# Altium PCB 4Z_PCB_2.PcbDoc (part 2 of 2)
Units mm, origin at the board's own origin, x right, y up, seen from the top; angles counter-clockwise.
Board outline 89.86 x 89.86 mm, 2 copper layers (Top Layer, Bottom Layer); 100 components, 102 nets, 472 pads, 154 vias.
Unrouted connection lines stored in the file: 1.
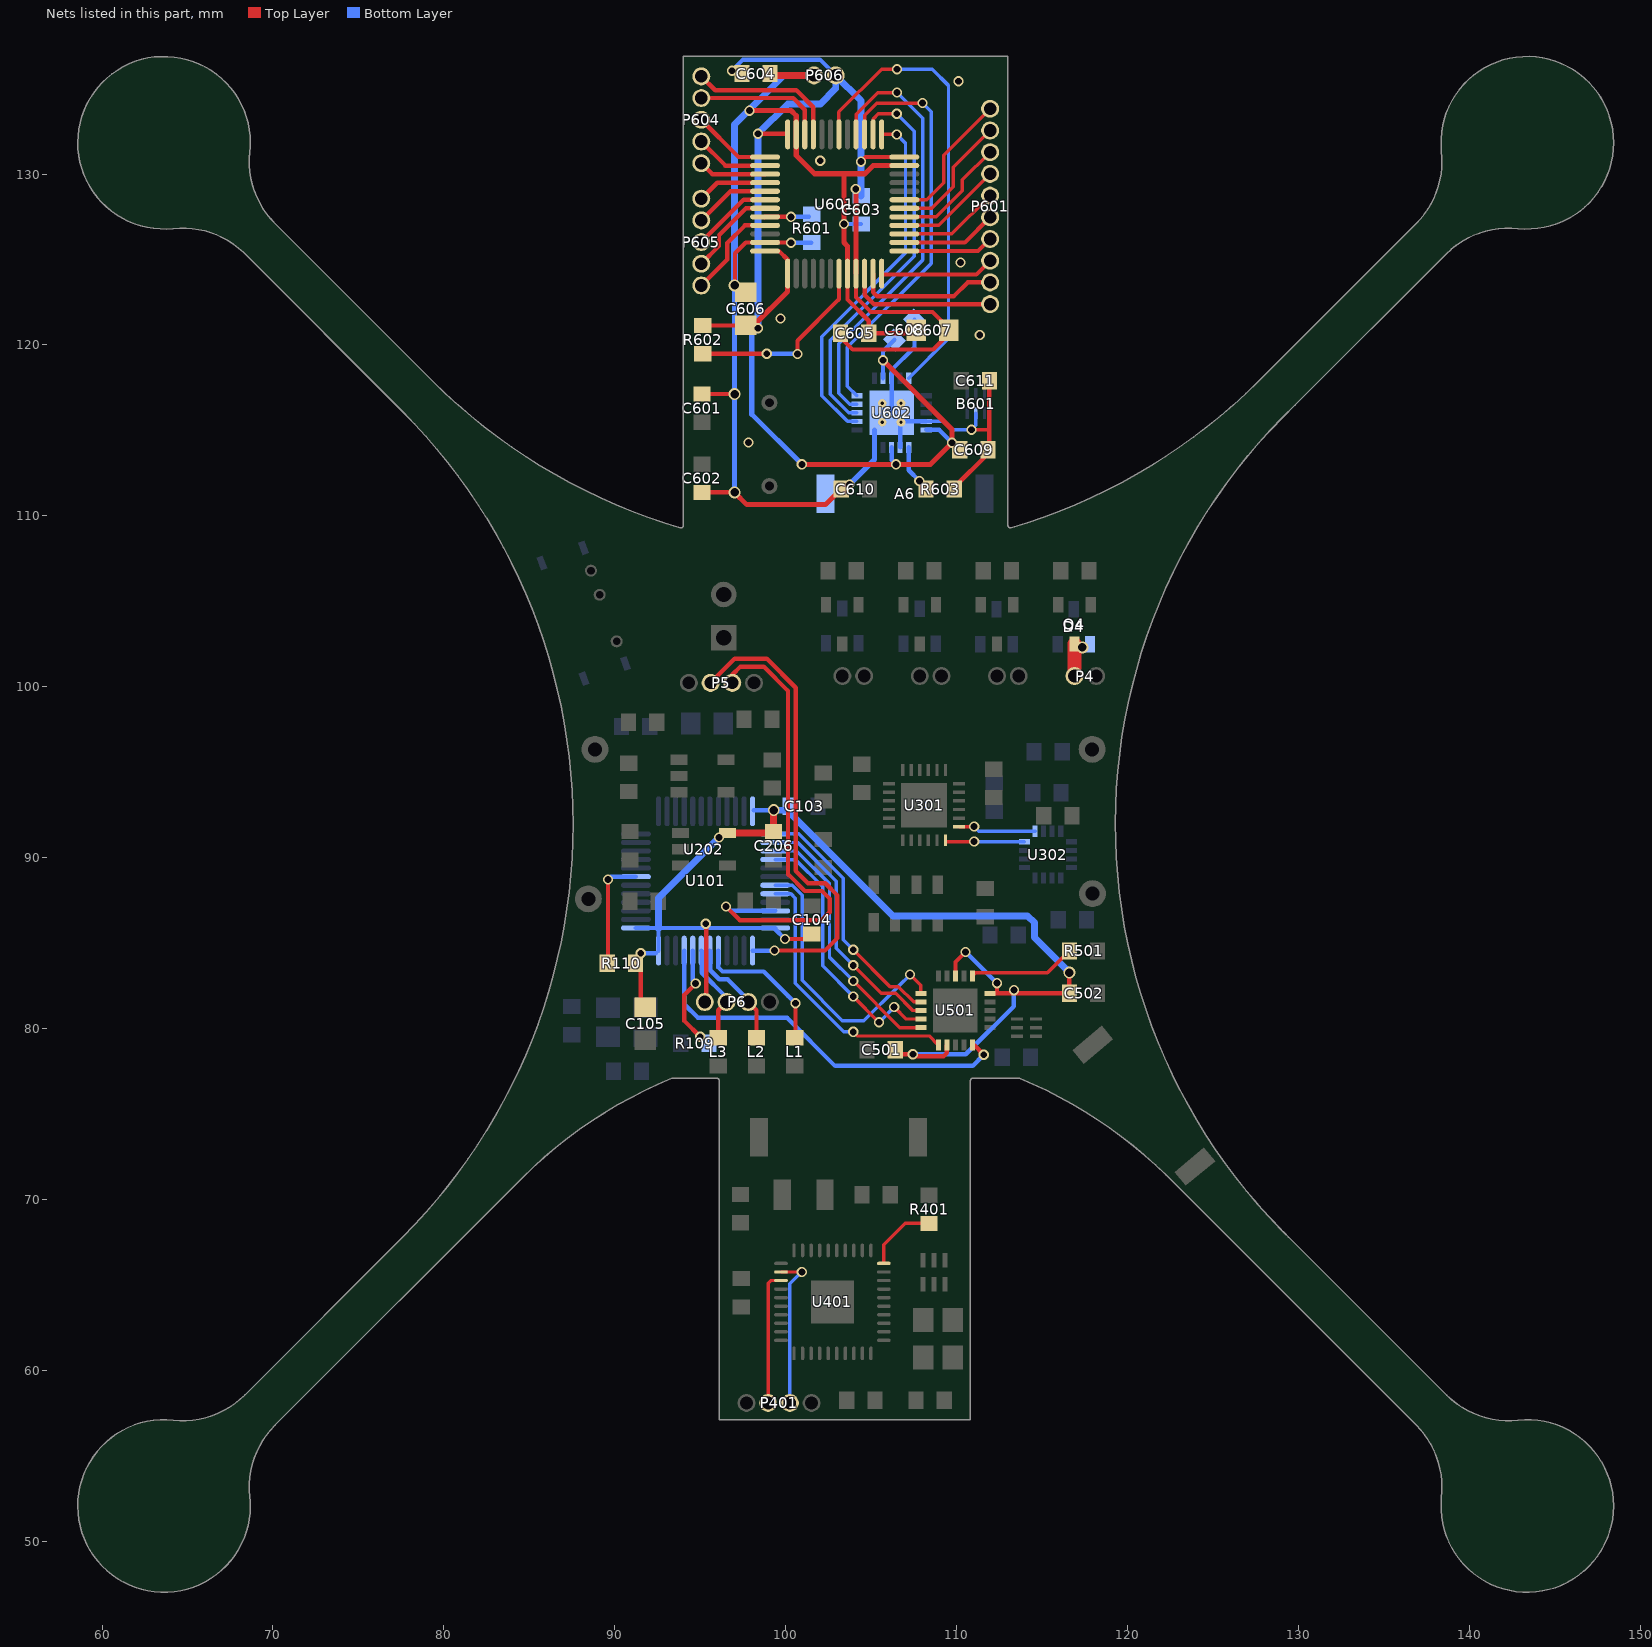
[diagram p2: the nets of this part, all layers, seen from the top]

## Via types
v1: diameter 0.6, hole 0.4, Top Layer to Bottom Layer, 116 vias
v2: diameter 0.7, hole 0.5, Top Layer to Bottom Layer, 18 vias
v3: diameter 0.5, hole 0.2, Top Layer to Bottom Layer, 16 vias
v4: diameter 8, hole 7, Top Layer to Bottom Layer, 4 vias

## Nets (pads, with @x,y where several pads share a name; then routed paths per layer and width w, separated by ;. In a path a pad name is that pad's centre, name@x,y a point inside that pad or via, vN(x,y) a via of type N, cw(c..) or ccw(c..) an arc to the next point about the centre after c; other vN are vias at no path point) (continued)
NetD4_1: D4.1 P4.1 Q4.3 | length 13.1
  Top Layer w0.8: P4.1@116.895,100.63 Q4.3@116.896,102.3 ; P4.1@116.895,100.63 Q4.3@116.896,102.501 ; P4.1@116.895,100.63 Q4.3@116.896,102.501 ; P4.1@116.895,100.63 Q4.3@116.896,102.3 ; P4.1@116.895,100.63 Q4.3@116.896,102.501 ; P4.1@116.895,100.63 Q4.3@116.896,102.3 ; P4.1@116.895,100.63 Q4.3@116.896,102.501 ; Q4.3@116.896,102.3 Q4.3@116.896,102.501 ; Q4.3@116.896,102.3 Q4.3@116.896,102.501 ; Q4.3@116.896,102.3 Q4.3@116.896,102.501
  other v2: 117.36,102.3
NetL1_2: L1.2 U101.41 | length 8.3
  Top Layer w0.254: L1.2@100.57,79.501 v1(100.57,81.48)
  Bottom Layer w0.254: U101.41@96.06,84.565 96.06,83.58 96.3,83.34 98.72,83.34 100.15,81.91 100.15,81.9 v1(100.57,81.48)
NetL2_2: L2.2 P6.3 U101.42 | length 6.5
  Top Layer w0.254: P6.3@97.805,81.56 98.289,81.076 L2.2@98.289,79.46
  Bottom Layer w0.254: U101.42@95.56,84.565 95.583,84.542 95.583,83.415 96.112,82.886 96.599,82.886 97.805,81.68 P6.3@97.805,81.56
NetL3_2: L3.2 P6.2 U101.43 | length 5.9
  Top Layer w0.254: L3.2@96.049,79.46 96.049,81.074 P6.2@96.535,81.56
  Bottom Layer w0.254: U101.43@95.06,84.565 95.083,84.542 95.083,83.273 96.535,81.821 P6.2@96.535,81.56
NetP401_2: P401.2 U401.2 | length 9.2
  Top Layer w0.2: U401.2@99.725,65.76 v1@100.94,65.76
  Bottom Layer w0.2: P401.2@100.242,58.098 100.242,65.063 v1(100.945,65.765)
NetP401_3: P401.3 U401.3 | length 7.8
  Top Layer w0.2: P401.3@98.972,58.098 98.972,65.098 99.135,65.26 U401.3@99.725,65.26
NetP601_1: P601.1 U601.10 | length 8.8
  Top Layer w0.254: U601.10@104.615,124.17 104.615,122.943 105.172,122.386 111.956,122.386 P601.1@111.96,122.39
NetP601_2: P601.2 U601.11 | length 8.4
  Top Layer w0.254: U601.11@105.115,124.17 105.115,123.085 105.36,122.84 109.825,122.84 110.645,123.66 P601.2@111.96,123.66
NetP601_3: P601.3 U601.12 | length 6.7
  Top Layer w0.254: U601.12@105.615,124.17 105.66,124.125 111.155,124.125 P601.3@111.96,124.93
NetP601_4: P601.4 U601.13 | length 5.3
  Top Layer w0.254: U601.13@106.94,125.495 111.255,125.495 P601.4@111.96,126.2
NetP601_5: P601.5 U601.14 | length 5.6
  Top Layer w0.254: U601.14@106.94,125.995 110.485,125.995 P601.5@111.96,127.47
NetP601_6: P601.6 U601.15 | length 5.9
  Top Layer w0.2: U601.15@106.94,126.495 109.715,126.495 P601.6@111.96,128.74
NetP601_7: P601.7 U601.16 | length 6.3
  Top Layer w0.2: U601.16@106.94,126.995 108.945,126.995 P601.7@111.96,130.01
NetP601_8: P601.8 U601.17 | length 7
  Top Layer w0.2: U601.17@106.94,127.495 108.82,127.495 110.34,129.015 110.34,129.66 P601.8@111.96,131.28
NetP601_9: P601.9 U601.18 | length 7.6
  Top Layer w0.2: U601.18@106.94,127.995 108.545,127.995 109.805,129.255 109.805,130.395 P601.9@111.96,132.55
NetP601_10: P601.10 U601.19 | length 8.2
  Top Layer w0.2: U601.19@106.94,128.495 108.25,128.495 109.24,129.485 109.24,131.1 P601.10@111.96,133.82
NetP604_1: P604.1 U601.33 | length 8.9
  Top Layer w0.254: P604.1@95.06,135.715 95.876,134.899 100.623,134.899 101.615,133.907 U601.33@101.615,132.32
NetP604_2: P604.2 U601.34 | length 7.8
  Top Layer w0.254: P604.2@95.06,134.445 100.435,134.445 101.115,133.765 U601.34@101.115,132.32
NetP604_3: P604.3 U601.37 | length 4.6
  Top Layer w0.254: P604.3@95.06,133.175 97.24,130.995 U601.37@98.79,130.995
NetP604_4: P604.4 U601.38 | length 4.3
  Top Layer w0.254: P604.4@95.06,131.905 96.47,130.495 U601.38@98.79,130.495
NetP604_5: P604.5 U601.39 | length 4
  Top Layer w0.254: P604.5@95.06,130.635 95.7,129.995 U601.39@98.79,129.995
NetP605_1: P605.1 U601.40 | length 4.1
  Top Layer w0.254: P605.1@95.06,128.56 95.995,129.495 U601.40@98.79,129.495
NetP605_2: P605.2 U601.41 | length 4.4
  Top Layer w0.254: P605.2@95.06,127.29 96.765,128.995 U601.41@98.79,128.995
NetP605_3: P605.3 U601.42 | length 4.8
  Top Layer w0.254: P605.3@95.06,126.02 97.535,128.495 U601.42@98.79,128.495
NetP605_4: P605.4 U601.43 | length 5.4
  Top Layer w0.254: P605.4@95.06,124.75 96.1,125.79 96.1,126.418 97.677,127.995 U601.43@98.79,127.995
NetP605_5: P605.5 U601.45 | length 5.8
  Top Layer w0.254: P605.5@95.06,123.48 96.58,125 96.58,125.965 97.61,126.995 U601.45@98.79,126.995
NetR109_1: R109.1 U101.44 | length 5.8
  Top Layer w0.254: v1(94.73,82.64) 94.07,81.98 94.07,80.45 v1(95,79.52)
  Bottom Layer w0.254: U101.44@94.56,84.565 94.56,82.81 v1(94.73,82.64)
NetR110_1: R110.1 U101.7 | length 6.6
  Top Layer w0.254: R110.1@89.6,83.862 v1(89.6,88.73)
  Bottom Layer w0.254: v1(89.6,88.73) 89.76,88.89 U101.7@91.235,88.89
NetR401_2: R401.2 U401.30 | length 4.2
  Top Layer w0.2: U401.30@105.745,66.26 105.745,66.905 105.745,67.35 106.995,68.6 107.44,68.6 R401.2@108.386,68.6
NetR501_1: R501.1 U501.16 | length 6.3
  Top Layer w0.2: U501.16@110.93,83.085 111.095,83.25 111.095,83.26 115.318,83.26 R501.1@116.599,84.541
NetR601_2: R601.2 U601.44 | length 2.6
  Top Layer w0.254: U601.44@98.767,127.472 U601.44@98.79,127.495 v1(100.315,127.495)
  Bottom Layer w0.254: v1(100.315,127.495) R601.2@101.366,127.495
NetR602_1: R602.1 U601.7 | length 11.2
  Top Layer w0.254: R602.1@95.178,119.455 95.213,119.49 v1(98.89,119.49) ; v1(100.69,119.475) 100.69,120.251 103.092,122.653 103.115,122.676 U601.7@103.115,124.17
  Bottom Layer w0.254: v1(98.89,119.49) 100.635,119.49 100.67,119.455 v1(100.69,119.475)
NetR603_1: R603.1 U602.16 | length 2.2
  Bottom Layer w0.254: U602.16@107.195,114.005 107.195,112.665 v1(107.82,112.04)
NetU101_25: U101.25 U501.2 | length 14.7
  Top Layer w0.2: v1(103.95,84.61) 106.1,82.46 106.596,82.46 107.496,81.56 U501.2@107.905,81.56
  Bottom Layer w0.2: U101.25@99.385,91.39 100.77,91.39 103.36,88.8 103.36,85.2 v1(103.95,84.61)
NetU101_26: U101.26 U501.3 | length 14.9
  Top Layer w0.2: v1(103.95,83.7) 105.59,82.06 106.43,82.06 107.43,81.06 U501.3@107.905,81.06
  Bottom Layer w0.2: U101.26@99.385,90.89 100.704,90.89 102.96,88.634 102.96,84.69 v1(103.95,83.7)
NetU101_27: U101.27 U501.5 | length 15.3
  Top Layer w0.2: v1(103.95,82.79) 106.68,80.06 U501.5@107.905,80.06
  Bottom Layer w0.2: U101.27@99.385,90.39 100.638,90.39 102.56,88.468 102.56,84.18 v1(103.95,82.79)
NetU101_28: U101.28 U501.4 | length 15.8
  Top Layer w0.2: v1(103.95,81.88) 105.455,80.375 v1(105.46,80.375) ; v1(106.345,81.265) 107.05,80.56 U501.4@107.905,80.56
  Bottom Layer w0.2: U101.28@99.385,89.89 100.573,89.89 102.16,88.303 102.16,83.67 v1(103.95,81.88) ; v1(105.46,80.375) 105.46,80.38 v1(106.345,81.265)
NetU101_31: U101.31 U501.1 | length 16.8
  Top Layer w0.2: v1@107.305,83.095 107.275,83.125 v1(107.275,83.164) 107.905,82.534 U501.1@107.905,82.06
  Bottom Layer w0.2: U101.31@99.385,88.39 100.376,88.39 100.96,87.806 100.96,82.819 103.319,80.46 104.571,80.46 106.605,82.494 v1(107.275,83.164) v1@107.344,83.095
NetU101_32: U101.32 U501.6 | length 16.1
  Top Layer w0.2: v1(103.95,79.81) 104.19,79.57 108.395,79.57 U501.6@108.93,79.035
  Bottom Layer w0.2: U101.32@99.385,87.89 100.31,87.89 100.56,87.64 100.56,82.653 103.403,79.81 v1(103.95,79.81)
NetU301_6: U301.6 U302.16 | length 4.5
  Top Layer w0.2: U301.6@109.425,90.945 v1(111.025,90.945)
  Bottom Layer w0.2: v1@111.04,90.93 U302.16@113.97,90.93
NetU301_7: U301.7 U302.1 | length 4.6
  Top Layer w0.2: U301.7@110.15,91.82 v1(111.025,91.82)
  Bottom Layer w0.2: v1(111.025,91.82) 111.295,91.55 U302.1@114.59,91.55
NetU601_25: U601.25 U602.2 | length 21.1
  Top Layer w0.2: U601.25@105.615,132.32 v1(106.495,132.32)
  Bottom Layer w0.2: U602.2@104.17,115.53 103.614,115.53 102.105,117.039 102.105,120.481 107.01,125.386 107.01,131.805 v1(106.495,132.32)
NetU601_26: U601.26 U602.3 | length 23.3
  Top Layer w0.2: U601.26@105.115,132.32 105.115,133.22 105.42,133.525 v1(106.495,133.525)
  Bottom Layer w0.2: U602.3@104.17,116.03 103.679,116.03 102.605,117.104 102.605,120.274 107.51,125.179 107.51,132.51 v1(106.495,133.525)
NetU601_27: U601.27 U602.5 | length 24.4
  Top Layer w0.2: U601.27@104.615,132.32 104.615,133.435 105.33,134.15 v1(108.01,134.15)
  Bottom Layer w0.2: U602.5@104.17,117.03 103.605,117.595 103.605,119.86 108.51,124.765 108.51,133.65 v1(108.01,134.15)
NetU601_28: U601.28 U602.4 | length 25.7
  Top Layer w0.2: U601.28@104.115,132.32 104.115,133.501 105.379,134.765 v1(106.515,134.765)
  Bottom Layer w0.2: U602.4@104.17,116.53 103.745,116.53 103.105,117.17 103.105,120.067 108.01,124.972 108.01,133.27 v1(106.515,134.765)
NetU601_30: U601.30 U602.10 | length 27.2
  Top Layer w0.2: U601.30@103.115,132.32 103.115,133.632 105.613,136.13 v1(106.515,136.13)
  Bottom Layer w0.2: v1(106.515,136.13) 108.575,136.13 109.525,135.18 109.525,120.385 U602.10@107.195,118.055
PIN24: C103.2 C104.2 C105.1 C206.2 C501.2 C502.1 P6.1 R110.2 U101.1 U101.24 U101.36 U101.48 U202.5 U501.7 U501.15 U501.18 | length 90
  Top Layer w0.254: R110.2@91.21,83.75 R110.2@91.21,83.821 ; v1(95.32,86.14) 95.357,86.103 P6.1@95.357,81.652 ; v1(99.96,85.24) C104.2@101.231,85.24 ; C501.2@106.671,78.5 v1(107.44,78.5) 107.557,78.383 109.233,78.383 109.43,78.58 U501.7@109.43,79.035 ; U501.18@109.953,83.085 U501.18@109.93,83.085 109.93,83.9 v1(110.515,84.485) ; 112.36,82.09 v1(112.36,82.66) ; C502.1@116.599,82.061 v2@116.599,83.269 ; C105.1@91.52,81.495 v1(91.52,84.41) C105.1@91.52,81.495 ; U501.15@111.955,82.06 C502.1@116.599,82.061 U501.15@111.955,82.06
  Top Layer w0.4: U202.5@96.588,91.44 C206.2@99.203,91.44 ; C206.2@99.287,91.524 v2@99.287,92.767
  Bottom Layer w0.254: U101.1@91.235,85.89 92.56,85.89 ; v1(91.52,84.41) 92.405,84.41 ; U101.48@92.56,84.565 92.56,85.85 ; U101.24@98.125,92.78 v2(99.3,92.78) ; v1(99.96,85.24) 99.385,85.815 U101.36@99.385,85.89 ; v1(107.44,78.5) 110.54,78.5 113.35,81.31 v1(113.35,82.25) ; v1(110.515,84.485) 110.535,84.485 v1(112.36,82.66) ; 92.56,85.89 U101.36@99.385,85.89 ; 92.56,85.89 U101.36@99.385,85.89
  Bottom Layer w0.4: 92.56,85.85 92.56,85.89 92.56,87.64 v1(96.1,91.18) ; v2(99.3,92.78) 100.087,92.78 106.272,86.595 114.155,86.595 114.548,86.202 114.548,85.322 v2(116.6,83.27)
SAGND: A6.2 B601.2 C601.1 C602.1 C603.1 C604.1 C605.1 C606.2 C607.2 C608.1 C609.1 C610.1 C611.1 P606.2 R601.1 R603.2 U601.8 U601.23 U601.35 U601.47 U602.8 U602.14 U602.17 U602.20 U602.21 | length 97.9
  Top Layer w0.2: v1@110.865,114.945 v1(110.865,115.035) 111.911,115.035 ; C609.1@111.831,113.864 C609.1@111.831,114.069
  Top Layer w0.254: C602.1@95.099,111.374 v2(97.005,111.374) ; C601.1@95.099,117.126 v2(97.005,117.126) ; v2(97.005,123.49) 97.034,123.49 97.034,125.369 97.66,125.995 U601.47@98.79,125.995 v1@100.29,125.995 ; U601.8@103.615,124.17 103.615,122.659 104.861,121.413 C605.1@104.861,120.679 C607.2@107.441,120.679 ; R603.2@109.865,111.67 111.831,113.636 C609.1@111.831,113.864 ; C609.1@111.916,113.949 C611.1@111.916,117.899
  Top Layer w0.3: v2(97.005,111.374) 97.724,110.655 102.333,110.655 C610.1@103.249,111.571 ; v1(97.875,133.71) 100.315,133.71 100.615,133.41 U601.35@100.615,132.32 100.615,131.08 101.68,130.015 104.64,130.015 105.12,130.495 U601.23@106.94,130.495 ; 103.405,129.975 v1(103.405,127.08) 103.405,125.99 103.615,125.78 U601.8@103.615,124.17
  Top Layer w0.4: C604.1@99.195,135.77 P606.2@101.655,135.77
  Bottom Layer w0.2: U602.14@108.22,115.53 109.3,115.53 109.795,115.035 v1(110.865,115.035) 111.13,115.3 B601.2@111.13,116.02
  Bottom Layer w0.254: v1(100.305,125.98) R601.1@101.502,125.98 ; v1(103.405,127.08) C603.1@104.405,127.08 ; U602.21@106.195,116.03 U602.8@106.195,118.055 106.195,118.53 107.532,119.867 C608.1@107.532,121.466 ; U602.17@106.695,114.005 106.695,115.53 U602.14@108.22,115.53
  Bottom Layer w0.3: v2(97.005,111.374) v2(97.005,117.126) v2(97.005,123.49) ; v1(103.73,111.83) 105.195,113.295 U602.20@105.195,114.005 U602.21@105.195,115.03
  Bottom Layer w0.4: v2(97.005,123.49) 97.005,132.89 99.885,135.77 P606.2@101.655,135.77
  other v1: 97.825,114.29 111.355,120.58 99.7,121.55 110.22,124.825 102.025,130.78 110.115,135.425
  other v3: 105.645,115.48 106.745,115.48 105.645,116.58 106.745,116.58
SPIN9: C603.2 C604.2 C605.2 C606.1 C607.1 C608.2 C609.2 P606.1 R602.2 U601.1 U601.9 U601.24 U601.36 U601.48 U602.7 U602.15 U602.18 | length 99
  Top Layer w0.254: R602.2@95.144,121.14 97.63,121.14 C606.1@97.655,121.165 C606.1@98.145,121.165 ; v1(98.38,132.36) U601.36@100.075,132.36 ; U601.48@98.79,125.495 99.6,125.495 100.115,124.98 U601.1@100.115,124.17 ; C605.2@103.21,120.679 103.21,120.44 103.913,119.737 108.628,119.737 109.535,120.645 C607.1@109.535,120.864 ; U601.9@104.115,124.17 104.115,122.801 104.138,122.778 104.984,121.932 108.588,121.932 C607.1@109.535,120.985 ; v1(104.405,130.725) 104.675,130.995 U601.24@106.94,130.995
  Top Layer w0.3: U601.1@100.115,124.17 100.115,123.135 ; v1(100.945,113.015) v1(106.45,113.015) 108.47,113.015 v1(109.735,114.28) 109.735,115.06 v1(105.69,119.105) ; U601.9@104.115,124.17 v1@104.115,129.105 ; C606.1@98.17,121.19 98.145,121.165 C606.1@98.17,121.19 ; C606.1@98.17,121.19 100.115,123.135 ; C606.1@98.17,121.19 100.115,123.135
  Bottom Layer w0.254: v1(96.855,136.045) 97.505,136.695 102,136.695 P606.1@102.925,135.77 ; U602.7@105.695,118.055 105.695,119.629 C608.2@106.364,120.298 ; U602.18@106.195,114.005 106.195,113.27 v1(106.45,113.015) ; U602.15@108.22,115.03 108.985,115.03 v1(109.735,114.28)
  Bottom Layer w0.3: v1(98.38,120.98) 98.015,120.615 98.015,115.945 v1(100.945,113.015)
  Bottom Layer w0.4: v1(98.38,120.98) v1(98.38,132.36) 100.12,134.1 102.03,134.1 102.925,134.995 P606.1@102.925,135.77 104.405,134.29 v1(104.405,130.725) ; C603.2@104.411,128.725 v1@104.411,130.719
  other v1: 104.095,129.125
SWCLK: P5.3 U101.37 | length 27.8
  Top Layer w0.254: P5.3@95.605,100.23 97.009,101.634 98.898,101.634 100.584,99.948 100.584,89.228 101.308,88.504 102.313,88.504 103.024,87.793 103.024,85.299 102.295,84.57 v1(99.34,84.57)
  Bottom Layer w0.254: U101.37@98.06,84.565 v1@99.335,84.565
SWDIO: P5.2 U101.34 | length 28.6
  Top Layer w0.254: v1(96.51,87.15) 97.32,86.34 102.095,86.34 102.57,86.815 102.57,87.605 102.125,88.05 101.12,88.05 100.13,89.04 100.13,99.76 98.71,101.18 97.35,101.18 96.875,100.705 P5.2@96.875,100.23
  Bottom Layer w0.254: v1(96.51,87.15) 96.77,86.89 U101.34@99.385,86.89
W_CLK: U101.45 U501.10 | length 23.3
  Top Layer w0.254: U501.10@110.93,79.035 111.025,79.035 v1(111.59,78.47)
  Bottom Layer w0.254: U101.45@94.06,84.565 94.06,81.43 94.86,80.63 100.08,80.63 102.89,77.82 110.94,77.82 v1(111.59,78.47)
pads on no net: B501.2 B501.6 B601.6 D1.2 D2.2 D3.2 D4.2 K201.0 K201.3 U101.2 U101.3 U101.4 U101.10 U101.11 U101.12 U101.13 U101.14 U101.15 U101.20 U101.33 U101.38 U101.39 U101.40 U101.46 U301.2 U301.3 U301.4 U301.5 U301.11 U301.14 U301.15 U301.16 U301.17 U301.19 U301.21 U301.22 U302.3 U302.5 U302.7 U302.14 U303. U303.6 U401.4 U401.5 U401.6 U401.7 U401.8 U401.9 U401.11 U401.12 U401.13 U401.14 U401.15 U401.16 U401.17 U401.18 U401.19 U401.20 U401.34 U401.35 U401.36 U401.37 U401.38 U501.9 U601.2 U601.3 U601.4 U601.20 U601.21 U601.31 U601.32 U601.46 U602.9
copper on no net:
  other v4: 63.625,52.075 143.4,52.075 63.625,131.825 143.4,131.825

## Polygon pours and split planes (outlines as drawn)
no net on Bottom Layer "Top Layer-No Net" (solid, pour order 43): 113.65,77.11 120.36,83.08 120.55,82.47 120.7,81.955 120.91,81.32 121.14,80.665 121.32,80.175 121.625,79.335 121.91,78.64 122.355,77.65 122.865,76.61 123.615,75.215 124.145,74.335 124.62,73.58 125.225,72.665 126.04,71.535 126.835,70.52 127.455,69.78 127.865,69.32 128.8,68.315 129.64,67.48 138.65,58.44 138.83,58.285 139.015,58.135 139.225,57.97 139.44,57.83 139.905,57.56 140.24,57.415 140.66,57.26 141.075,57.14 141.5,57.05 141.765,57.015 141.99,57 142.26,56.995 138.42,53.74 138.34,54.185 138.26,54.535 138.155,54.89 138.015,55.25 137.86,55.56 137.75,55.77 137.63,55.975 137.44,56.25 137.215,56.535 136.95,56.835 136.69,57.085 135.955,57.815 135.7,58.065 123.99,69.795 123.365,70.42 122.115,71.685 121.05,72.67 120.07,73.485 118.97,74.325 117.895,75.035 116.645,75.785 115.585,76.35 114.525,76.835 113.935,77.05 113.65,77.11
GND on Bottom Layer "Top Layer-No Net" (solid, pour order 49): 120.138,99.592 119.946,98.724 119.97,98.8 120.04,99.13 120.06,99.23 120.09,99.36 120.11,99.46 120.13,99.55 120.15,99.64 120.19,99.8 120.25,100.05 120.34,100.42 120.44,100.78 120.53,101.13 120.68,101.64 120.85,102.21 121.03,102.76 121.14,103.06 121.3,103.53 121.49,104.04 121.59,104.28 121.75,104.69 121.88,105.01 122.06,105.43 122.26,105.88 122.48,106.37 122.61,106.63 122.73,106.88 122.89,107.2 123.06,107.54 123.24,107.89 123.45,108.27 123.63,108.6 123.93,109.11 124.2,109.56 124.39,109.87 124.71,110.38 125.05,110.89 125.54,111.6 126.02,112.26 126.52,112.91 127.1,113.63 127.47,114.06 127.77,114.4 128.18,114.87 128.66,115.39 129.18,115.92 129.8,116.52 130.45,117.16 138.62,125.34 138.83,125.54 139.07,125.75 139.41,125.99 139.8,126.23 140.16,126.41 140.42,126.51 140.73,126.63 140.95,126.7 141.2,126.75 141.54,126.82 141.95,126.87 ccw(c141.902,126.918) 141.97,126.918 ccw(c141.821,126.918) 141.926,127.024 138.61,130.34 ccw(c138.514,130.244) 138.513,130.38 138.47,130.38 ccw(c138.47,130.332) 138.436,130.366 138.41,130.34 ccw(c138.458,130.292) 138.39,130.292 138.37,129.96 138.31,129.67 138.27,129.54 138.25,129.44 138.22,129.35 138.17,129.16 138.09,128.93 137.98,128.66 137.83,128.34 137.72,128.15 137.53,127.84 137.3,127.52 137.06,127.25 136.93,127.11 136.52,126.71 136.31,126.5 127.53,117.71 127.11,117.31 126.62,116.86 126.18,116.46 125.76,116.09 125.49,115.86 125.07,115.52 124.46,115.04 123.9,114.61 123.22,114.12 122.57,113.67 121.86,113.22 121.1,112.75 120.19,112.22 119.31,111.75 118.71,111.44 118.15,111.17 117.68,110.94 117.32,110.78 116.8,110.55 116.43,110.41 115.67,110.1 114.98,109.85 114.49,109.68 114.18,109.57 113.8,109.46 113.15,109.25 112.81,109.2 111.98,109.13 117.7,109.12 119.74,107.08 119.74,99.85 119.74,99.592
no net on Bottom Layer "Top Layer-No Net" (solid, pour order 37): 86.17,81.8 86.51,81.79 86.52,78.51 88.75,78.5 88.75,76.42 90.28,76.42 90.28,75.73 89.76,75.39 88.78,74.79 88.11,74.31 87.38,73.77 86.27,72.9 85.54,72.28 84.6,71.39 83.66,70.43 82.37,69.15 81.53,68.29 80.88,67.63 79.98,66.73 79.3,66.04 70.09,56.83 69.65,56.32 69.44,56.04 69.14,55.58 68.83,54.83 68.68,54.27 68.58,53.74 68.54,53.09 64.89,56.93 65.53,57.01 66.25,57.22 66.99,57.5 67.55,57.81 68.08,58.22 68.63,58.74 69,59.14 69.44,59.59 78,68.13 78.88,69.09 80.4,70.88 81.24,72.03 81.9,72.99 82.65,74.17 83.29,75.28 83.83,76.28 84.64,77.95 85.39,79.74 85.79,80.81 86.08,81.78 86.08,81.79
GND on Bottom Layer "Top Layer-No Net" (solid, pour order 39): 83.23,108.68 89.66,110.75 88.47,111.31 86.49,112.35 84.62,113.53 83.24,114.49 82.17,115.29 81.36,115.97 80.49,116.73 79.89,117.29 79.07,118.09 78.43,118.73 69.92,127.15 69.52,127.69 69.26,128.09 69.12,128.37 68.89,128.85 68.74,129.36 68.63,129.83 68.56,130.39 68.54,130.76 65.18,126.94 65.11,126.86 65.51,126.84 65.92,126.75 66.32,126.64 67.03,126.37 67.46,126.12 67.93,125.82 68.27,125.53 68.55,125.27 68.91,124.89 69.47,124.33 69.79,124 70.23,123.55 77.42,116.36 78.52,115.29 79.76,113.87 80.63,112.71 81.89,110.98 83.06,109.12 83.23,108.68
BGND on Bottom Layer "Top Layer-No Net" (solid, remove dead copper, pour order 34): 110.95,76.325 110.935,76.31 95.97,76.31 95.97,74.81 95.97,56.935 97.275,56.935 97.275,56.95 110.957,56.95
SAGND on Bottom Layer "Top Layer-No Net" (solid, remove dead copper, pour order 27): 112.998,136.88 112.998,119.17 100.25,119.17 100.25,136.93
SAGND on Bottom Layer "Top Layer-No Net" (solid, remove dead copper, pour order 32): 112.995,109.7 112.995,118.905 112.035,118.905 99.985,118.905 99.985,122.94 99.985,136.88 94.015,136.88 93.995,136.88 93.995,109.705
DGND on Bottom Layer "Top Layer-No Net" (solid, remove dead copper, pour order 29): 120.36,83.08 114.23,76.95 113.675,77.19 112.88,77.19 93.32,77.19 91.8,76.51 90.28,75.73 90.28,76.42 88.75,76.42 88.75,78.5 86.52,78.51 86.51,81.78 86.08,81.78 86.32,82.585 86.545,83.39 86.715,84.17 86.885,84.89 86.945,85.15 89.28,85.15 119.565,85.15 119.895,85.15
AGND on Bottom Layer "Top Layer-No Net" (solid, remove dead copper, pour order 35): 119.915,85.15 118.49,85.15 100.815,85.15 100.82,85.965 100.82,98.48 102.715,98.485 119.88,98.485 119.625,97.07 119.51,96.285 119.4,95.09 119.315,94 119.298,92.842 119.275,91.405 119.398,89.065 119.621,86.805
GND on Bottom Layer "Top Layer-No Net" (solid, remove dead copper, pour order 36): 119.88,98.485 120.129,99.55 120.138,99.592 119.74,99.592 119.74,107.08 117.71,109.11 111.98,109.13 108.04,109.13 93.925,109.13 92.81,109.5 91.915,109.815 91.195,110.065 90.585,110.315 90.005,110.55 89.66,110.75 83.23,108.68 83.84,107.496 84.365,106.515 84.885,105.295 85.33,104.22 85.66,103.34 86.03,102.265 86.33,101.25 86.55,100.415 86.835,99.205 87.08,97.93 87.285,96.705 87.425,95.53 87.575,93.78 87.61,92.13 87.585,90.55 87.48,89.115 87.385,88.371 87.295,87.305 87.18,86.47 87.045,85.645 86.945,85.15 86.95,85.145 92.425,85.145 100.4,85.145 100.4,85.37 100.4,98.69 100.605,98.485 119.88,98.485
GND on Bottom Layer "Top Layer-No Net" (solid, pour order 41): 101.905,98.56 101.905,98.98 101.895,98.99 100.505,100.38 100.505,100.49 100.505,103.735 100.37,103.87 100.425,103.925 100.425,104.74 100.425,104.84 99.79,105.475 98.605,106.66 97.51,106.66 97.51,104.47 97.385,104.345 98.11,103.62 98.11,102.865 98.11,99.01 98.4,98.72
AGND on Bottom Layer "Top Layer-No Net" (solid, pour order 42): 103.36,88.8 103.565,89.005 103.755,89.005 103.775,89.005 105.7,87.08 106.36,86.42 106.88,86.42 106.9,86.42 107.8,85.52 105.32,83.04 105.26,83.04 104.095,83.04 103.595,83.54 103.235,83.9 103.235,85.92
AGND on Bottom Layer "Top Layer-No Net" (solid, pour order 50): 103.625,96.435 104.325,97.135 105.01,97.135 105.01,95.35 105.01,91.22 104.975,91.185 102.875,91.185 102.875,93.91 102.575,94.21 102.435,94.35 102.435,95.91
SAGND on Top Layer "Top Layer-No Net" (solid, remove dead copper, pour order 30): 112.995,109.7 112.995,118.905 108.8,118.905 99.97,118.905 99.97,122.365 99.97,136.88 94.015,136.88 93.995,136.88 93.995,109.705
GND on Top Layer "Top Layer-No Net" (solid, pour order 47): 122.54,106.48 118.08,111.13 120.22,112.16 121.3,112.815 123.045,113.93 125.04,115.415 126.705,116.85 128.45,118.53 137.265,127.365 137.81,128.14 137.98,128.49 138.175,128.905 138.29,129.32 138.43,130.1 138.455,130.33 138.47,130.425 138.95,130.02 141.935,127.045 142.01,126.915 141.965,126.865 141.78,126.86 141.27,126.79 140.785,126.66 140.305,126.495 139.74,126.22 139.22,125.89 138.845,125.575 138.43,125.185 138.025,124.78 128.49,115.325 127.62,114.33 126.885,113.46 126.3,112.755 125.63,111.795 125.005,110.865 124.47,110.04 123.82,109.035 123.26,108.05 122.815,107.155
GND on Top Layer "Top Layer-No Net" (solid, pour order 46): 82.44,110.13 85.89,112.73 83.665,114.14 82.185,115.265 80.545,116.695 79.13,118.005 75.62,121.495 70.07,127.045 69.43,127.77 68.995,128.58 68.715,129.34 68.58,130.11 68.545,130.775 65.15,126.88 65.81,126.81 66.56,126.595 67.17,126.32 67.75,125.98 68.165,125.625 69.005,124.775 69.64,124.165 78.7,115.08 79.645,114.055 80.62,112.76 81.465,111.575
no net on Top Layer "Top Layer-No Net" (solid, pour order 44): 86.05,81.78 86.52,81.78 86.52,78.55 88.755,78.55 88.755,76.425 90.305,76.425 90.305,75.725 88.655,74.69 87.07,73.525 85.19,71.95 83.175,69.93 81.1,67.855 69.915,56.67 69.36,55.93 69.165,55.615 68.85,54.875 68.715,54.335 68.61,53.95 68.565,53.495 68.545,53.11 64.895,56.925 65.83,57.075 66.805,57.425 67.86,58.01 69.025,59.145 70.005,60.135 78.525,68.575 80.36,70.825 81.515,72.35 82.6,74.045 83.605,75.84 84.615,77.88 85.395,79.735
SAGND on Top Layer "Top Layer-No Net" (solid, remove dead copper, pour order 28): 112.998,136.88 112.998,119.155 107.4,119.155 100.245,119.155 100.245,136.88
DGND on Top Layer "Top Layer-No Net" (solid, remove dead copper, pour order 31): 120.36,83.055 114.245,76.94 113.7,77.165 113.695,77.17 112.58,77.17 93.26,77.17 92.53,76.825 92.075,76.63 91.31,76.25 90.735,75.95 90.305,75.725 90.305,76.425 88.755,76.425 88.755,78.55 86.52,78.55 86.52,81.78 86.05,81.78 86.225,82.35 86.42,82.98 86.59,83.64 86.695,84.06 86.825,84.63 86.94,85.15 87.7,85.15 119.9,85.15
AGND on Top Layer "Top Layer-No Net" (solid, remove dead copper, pour order 33): 119.9,85.15 118.275,85.15 115.34,85.15 100.79,85.15 100.8,85.16 100.8,99.585 100.805,99.58 102.665,99.58 120.07,99.58 119.85,98.385 119.74,97.77 119.635,97.135 119.535,96.375 119.48,95.83 119.395,94.995 119.275,93.595 119.235,91.61 119.3,89.9 119.38,88.85 119.555,87.295
GND on Top Layer "Top Layer-No Net" (solid, remove dead copper, pour order 38): 120.07,99.58 120.07,100.62 120.41,100.96 120.685,101.83 120.96,102.66 121.355,103.815 121.73,104.735 122.025,105.42 122.29,105.98 122.54,106.48 118.08,111.13 117.555,110.895 116.87,110.6 116.315,110.36 115.6,110.08 114.945,109.835 114.3,109.62 113.755,109.45 113.055,109.24 112.005,109.135 110.58,109.135 93.915,109.135 92.365,109.675 90.54,110.395 89.7,110.735 89.13,110.97 88.49,111.275 87.525,111.78 86.985,112.085 86.445,112.375 86.11,112.595 85.89,112.73 82.44,110.13 83.18,108.855 83.385,108.47 83.725,107.775 83.93,107.37 84.16,106.915 84.43,106.335 84.705,105.78 84.91,105.25 85.04,104.91 85.25,104.39 85.365,104.105 85.495,103.775 85.585,103.53 85.805,102.92 86.085,102.08 86.36,101.1 86.555,100.36 86.735,99.635 86.865,99.05 86.975,98.47 87.075,97.87 87.255,96.865 87.36,95.955 87.4,95.55 87.49,94.765 87.565,93.6 87.61,92.725 87.605,90.945 87.505,89.475 87.355,87.735 87.205,86.71 87.04,85.585 86.94,85.15 86.945,85.155 88.58,85.155 100.67,85.155 100.68,85.165 100.68,88.645 100.68,99.44 100.89,99.65
GND on Top Layer "Top Layer-No Net" (solid, pour order 40): 105.292,99.634 104.925,99.267 104.925,99.11 103.73,99.11 103.69,99.07 102.705,98.085 102.605,98.085 102.605,98.06 101.58,97.035 101.34,96.795 101.34,96.72 100.62,96.72 100.56,96.78 100.635,96.855 100.635,98.26 100.635,99.38 100.695,99.44 100.905,99.65 100.917,99.65
AGND on Top Layer "Top Layer-No Net" (solid, pour order 45): 104.845,85.135 103.333,85.135 103.318,85.15 102.75,85.718 102.75,88.045 102.75,89.449 102.489,89.71 104.255,89.71 104.47,89.71 104.845,89.335
GND on Top Layer "Top Layer-No Net" (solid, pour order 48): 106.083,99.631 105.296,99.631 104.725,99.06 105.37,98.415 105.37,98.24 108.895,98.24 109.315,97.82 112.19,97.82 112.5,97.82 113.77,96.55 114.7,97.48 117.575,97.48 117.69,97.48 119.295,99.085 119.36,99.15 119.36,99.71
DGND on Top Layer "Top Layer-No Net" (solid, pour order 51): 93.25,85.05 93.215,85.215 93.215,87.41 96.165,92.51 98.879,92.169 100.024,92.024 100.655,88.485 101.15,87.805 101.015,87.205 101.045,87.175 101.1,87.12 101.1,85.05
SAGND on Top Layer "Top Layer-No Net" (solid, pour order 52): 99.97,121.286 100.366,121.286 101.91,122.83 102.08,123 102.08,123.66 101.365,123.66 101.175,123.85 100.675,123.35 99.965,123.35 99.965,123.215 99.85,123.1

## Other copper
Top Layer:
  pour cut-out: 99.5,86.065 100.105,86.065 100.375,86.235 100.267,86.549 100.243,86.573
  pour cut-out: 93.739,99.634 93.751,99.703 93.939,99.612 93.947,99.547
  pour cut-out: 93.604,99.561 93.487,99.51 93.674,99.472 93.817,99.506 93.849,99.553
  pour cut-out: 94.941,100.724 94.96,100.74 95.05,100.785 95.322,100.913 95.309,100.804 95.078,100.529 94.879,100.431
  pour cut-out: 93.739,99.634 93.604,99.561 94.03,99.45 94.14,99.59
  pour cut-out: 96.497,101.856 96.5,101.54 96.89,101.89
  pour cut-out: 94.353,97.134 94.37,96.99 91.45,97.05 91.27,97.23 91.78,97.25 94.13,97.23
  pour cut-out: 114.01,79.26 114.12,79.26 114.12,80.68 114.02,80.68
  pour cut-out: 95.89,90.04 95.7,89.85 95.9,89.71
  pour cut-out: 95.16,88.69 95.3,88.8 95.3,88.82 95.14,88.91
  pour cut-out: 91.456,98.331 91.813,98.331 91.813,98.06 92.01,98.06 92.01,97.42 92.899,97.423 93.156,97.498 93.63,97.41 93.96,97.41 94.311,97.613 94.353,97.134 91.436,97.142 91.27,97.23
  pour cut-out: 93.514,98.34 93.156,97.982 93.139,98.251 93.205,98.319 93.253,98.369
  pour cut-out: 94.19,98.07 94.17,98.34 93.74,98.35
  pour cut-out: 106.713,82.743 106.985,83.015 107.21,82.79 107.385,82.79 107.385,82.73 107.905,82.21 107.905,82.06 107.54,82.06 107.365,81.885
  pour cut-out: 104.65,85.47 104.645,85.475 104.65,85.48 104.65,87.775 104.52,87.775 103.825,88.47 103.95,88.595 103.95,91.955 104.18,92.185 104.945,91.42 104.99,91.42 104.99,90.663 106.483,89.17 109.455,89.17 109.455,86.094 109.456,86.095 110.09,86.095 110.09,85.675 109.63,85.215 104.675,85.215 104.655,85.235
  pour cut-out: 111.665,89.955 111.831,90.121 111.831,90.195 112.07,90.195 112.44,89.825 112.425,89.81 112.425,88.71 112.125,88.71 112.045,88.63
  pour cut-out: 113.351,94.245 113.895,94.245 113.895,92.5 114.115,92.28 114.645,92.28 114.645,92.27 113.355,90.98 113.265,90.98
  pour cut-out: 98.903,93.177 98.905,93.178 98.905,93.52 99.845,93.52 99.955,93.41 99.93,93.385 99.93,92.88
  pour cut-out: 90.108,98.69 89.91,98.69 89.88,98.66 89.95,98.59 89.95,97.053 90.063,97.166 90.108,97.166 90.108,97.543 90.365,97.8 90.355,97.81 90.355,98.055
  pour cut-out: 101.491,90.064 101.491,90.891 101.6,91 101.98,90.62 104.17,90.62 104.17,89.925 104.075,89.83
  pour cut-out: 95.627,87.821 95.627,88.953 95.809,89.135 96.15,89.135 96.15,89.081 96.655,88.576 96.655,88.135 96.657,88.135 97.12,87.672 97.12,87.27 97.09,87.27 96.94,87.12 96.77,87.29 96.035,87.29
  pour cut-out: 100.759,87.58 100.759,88.079 100.76,88.08 100.91,87.93 100.945,87.93
  pour cut-out: 99.982,86.691 99.982,86.602 99.96,86.58 99.95,86.59 98.595,86.59 98.595,86.565 98.585,86.555 98.585,86.691
  pour cut-out: 98.277,86.745 98.277,86.592 98.245,86.56 98.132,86.673 97.367,86.673 97.215,86.825
  pour cut-out: 95.309,89.959 96.945,90.965 96.455,91.21 95.355,90.22 95.235,90.005
Bottom Layer:
  pour cut-out: 92.88,83.51 92.75,83.72 92.423,83.51 92.651,83.419
  pour cut-out: 93.59,83.147 93.727,83.147 93.79,83.62 93.35,83.62 93.233,83.503
  pour cut-out: 114.495,91.025 116.185,91.025 116.185,89.389 115.986,89.19 115.22,89.19 115.26,89.14 114.57,89.14 114.48,89.23 114.315,90.095
  pour cut-out: 95.11,106.07 95.69,106.06 95.83,106.21 95.18,106.27 88.57,106.3 88.143,106.336 88.358,105.385 88.6,105.79 89.15,106.02
  pour cut-out: 96.497,103.864 96.5,104.33 97,103.82
  pour cut-out: 97.24,103.44 97.56,103.27 97.5,101.9 97.387,101.856 97.02,101.91 97.12,102.23 97.12,103.26
  pour cut-out: 114.215,76.955 114.873,77.613 114.299,77.613 113.975,77.289 113.975,77.129 113.903,77.057 114.035,76.925 114.18,76.925
  pour cut-out: 113.48,77.47 114.26,77.47 114.355,77.375 114.035,77.055 114.035,76.925 113.675,76.925 113.41,77.19
  pour cut-out: 109.115,124.435 109.115,124.285 109.345,124.285 109.345,120.12 107.22,118.37 104.98,118.565 103.625,119.415
  pour cut-out: 103.235,84.95 103.235,84.93 103.62,84.545 103.485,84.41 103.485,83.395 103.415,83.395 103.025,83.785
  pour cut-out: 105.31,82.895 106.6,84.185 106.6,84.27 106.38,84.27 106.21,84.44 104.97,83.2 104.91,83.2
  pour cut-out: 108.17,85.305 108.17,85.725 107.925,85.97 107.735,85.78 107.17,85.78 107.17,85.273 107.293,85.15
  pour cut-out: 92.91,82.675 92.905,82.68 92.905,83.91 92.405,84.41 92.275,84.28 91.205,84.28 91.205,83.8 91.775,83.23 91.775,82.91
  pour cut-out: 90.405,77.605 91.464,77.605 91.57,77.499 91.61,77.539 91.61,80.535 90.11,80.535 89.195,81.45 88.82,81.075 86.785,81.075 86.785,79.885 86.65,79.75 87.405,78.995 88.825,78.995 89.285,78.535 89.285,77.6
  pour cut-out: 92.475,88.79 92.5,88.765 92.995,88.765 92.995,88.195 93.01,88.18 92.52,87.69 91.97,87.69 91.7,87.96 91.715,87.975 91.715,88.85
  pour cut-out: 95.06,91.3 95.06,92.23 95.02,92.27 95.1,92.35 96.235,92.35 96.235,91.345 96.345,91.235 95.985,90.875 95.525,90.875
  pour cut-out: 99.605,82.84 100.49,83.755 100.315,84.95 99.43,84.97 98.06,84.565 98.17,83.78 98.49,83.54
  pour cut-out: 101.08,81.48 101.275,81.715 100.85,82.425 100.215,82.84 99.365,82.86 99.605,82.635
  pour cut-out: 96.795,83.17 98.84,83.105 100.15,81.9 100.375,81.009 100.08,80.63 98.24,80.7 97.19,81.515
  pour cut-out: 114.299,84.719 114.305,84.725 114.72,84.725 114.28,85.165 113.915,85.165

## Silkscreen, mask and mechanical layers (free items; w line width, h text height)
Top Overlay:
  lines w0.3: 94.028,109.45 112.998,109.45 ; 95.957,76.95 110.957,76.95
Mechanical 1:
  lines w0.3: 68.18,125.297 77.491,115.986 cw(c53.33,91.95) 77.491,67.914 68.252,58.675 cw(c64.717,62.211) 64.182,57.239 ccw(c63.626,52.069) 68.796,52.625 cw(c73.768,53.16) 70.232,56.695 84.694,71.158 cw(c103.507,52.345) 93.387,76.95 95.957,76.95 95.957,56.95 ; 68.252,125.225 ccw(c64.717,121.689) 64.182,126.66 cw(c63.626,131.831) 68.796,131.275 ccw(c73.768,130.74) 70.232,127.205 79.471,117.966 ccw(c103.507,142.17) 93.865,109.45 93.865,137.031 113.149,137.031 113.149,109.45 ccw(c103.507,142.17) 127.543,117.966 136.782,127.205 ccw(c133.246,130.74) 138.217,131.275 cw(c143.388,131.831) 142.832,126.66 ccw(c142.297,121.689) 138.762,125.225 129.523,115.986 ; 95.957,56.95 110.957,56.95 110.957,76.95 113.627,76.95 cw(c103.507,52.345) 122.319,71.158 ; 122.167,71.31 136.782,56.695 cw(c133.246,53.16) 138.217,52.625 ccw(c143.388,52.069) 142.832,57.239 cw(c142.297,62.211) 138.762,58.675 ; 129.094,68.343 138.772,58.665 138.787,58.649 ; 129.523,67.914 cw(c153.136,91.956) 129.908,116.371